# EAGLE board Apo Board 2017 ATmega328_SMD (EAGLE 7.6.0)
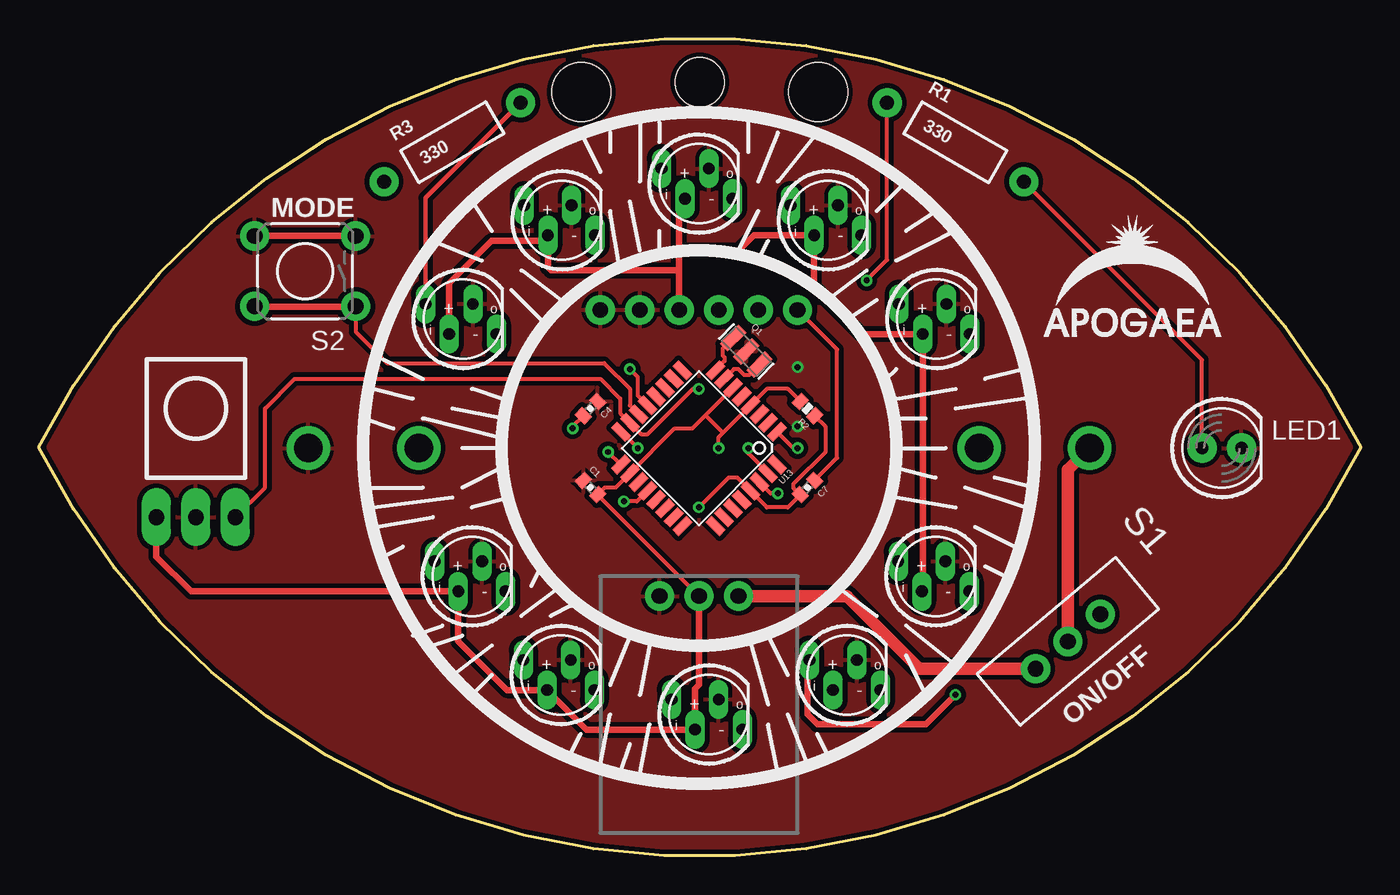
[diagram p0: board, top side]
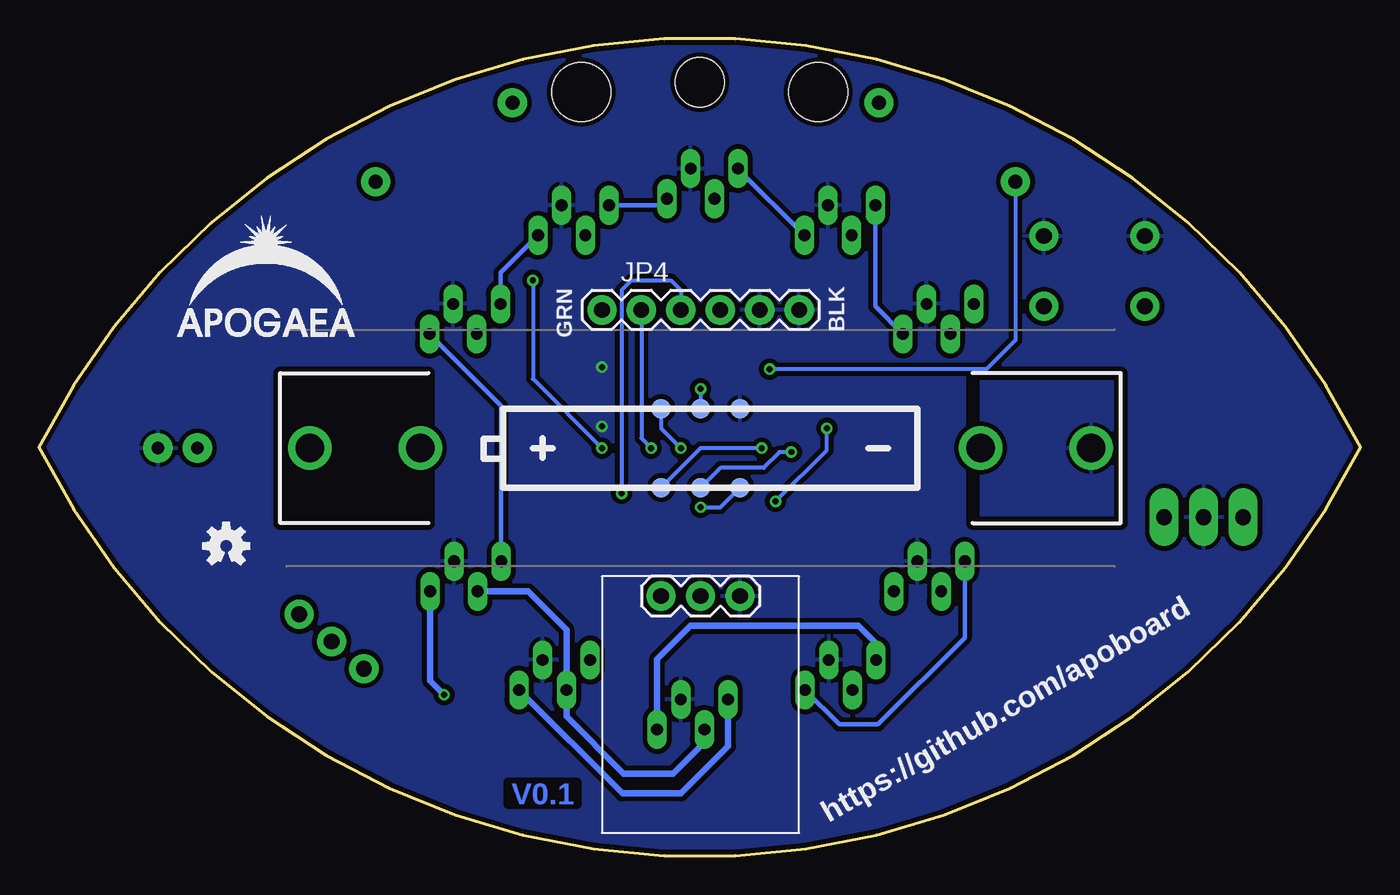
[diagram p1: board, bottom side, seen from below]

Size 85.09 x 52.56 mm. Coordinates in mm from the lower left corner, seen from the top.
Outline: 0,26.28 arc-127 85.09,26.28 arc-127 0,26.28
Copper layers (1*16): Top 0.035mm / dielectric 1.5mm / Bottom 0.035mm
Design rules "SparkFun-2-layer-TIGHT": minimum track width 7mil, minimum drill 15mil, track to track 7mil, track to pad 7mil, pad to pad 7mil, via to via 7mil, smd to smd 7mil, copper to edge 7mil, drill to drill 7mil, minimum pad ring 7mil, minimum via ring 7mil, stop-mask expansion 4mil, vias tented up to drill 25mil, thermal gap 10mil
Net classes: 0 default: width 0.152 mm, drill 0.305 mm, clearance 0.152 mm; 1 vcc: width 0.254 mm; 3 ButtonSignal: width 0.254 mm
Holes 3.17 mm at 42.55,49.78
Holes 3.81 mm at 50.16,49.14 34.92,49.14

## Footprints (pad centres in the part's own frame; a part is rotated, then mirrored left to right if it is on the bottom)
BATTERY-AA-KIT = drill 1.854: GND@1 25.146,0; GND@2 18.034,0; PWR@1 -25.146,0; PWR@2 -18.034,0
0402-CAP = smd 0.7 x 0.9: 1 -0.65,0; 2 0.65,0
1X03_IR_RECEIVER = drill 1.016 pad 1.88 long: 1 -2.54,0; 2 0,0; 3 2.54,0
1X03_BOOST = drill 1.016 pad 1.88: 1 -2.54,0; 2 0,0; 3 2.54,0
FTDI_BASIC = drill 1.016 pad 1.88: CTS 10.16,0; DTR 0,0; GND 12.7,0; RXI 2.54,0; TXO 5.08,0; VCC 7.62,0
LED5MM = drill 0.813 pad 1.88: A -1.27,0; K 1.27,0
RESONATOR-SMD = smd 0.7 x 1.7: 1 -1.2,0; 2 0,0; 3 1.2,0
AXIAL-0.4 = drill 0.9 pad 1.88: P$1 -5.08,0; P$2 5.08,0
0402-RES = smd 0.7 x 0.9: 1 -0.65,0; 2 0.65,0
SWITCH-SPDT_KIT = drill 1.016 pad 1.88: 1 0,2.718; 2 0,0; 3 0,-2.718
TACTILE-PTH = drill 1.016 pad 1.88: 1 -3.251,2.261; 2 3.251,2.261; 3 -3.251,-2.261; 4 3.251,-2.261
PAD.03X.05 = smd 1.27 x 1.27: P$1 0,0
LED-RGB-THRU = drill 0.762 pad 1.27 long: 1 2.413,-0.968; 2 0.889,0.968; 3 -0.635,-0.968; 4 -2.159,0.968
TQFP32-08 = smd 1.27 x 0.559: 1 -4.293,2.8; 2 -4.293,2; 3 -4.293,1.2; 4 -4.293,0.4; 5 -4.293,-0.4; 6 -4.293,-1.2; 7 -4.293,-2; 8 -4.293,-2.8; 17 4.293,-2.8; 18 4.293,-2; 19 4.293,-1.2; 20 4.293,-0.4; 21 4.293,0.4; 22 4.293,1.2; 23 4.293,2; 24 4.293,2.8 | smd 0.559 x 1.27: 9 -2.8,-4.293; 10 -2,-4.293; 11 -1.2,-4.293; 12 -0.4,-4.293; 13 0.4,-4.293; 14 1.2,-4.293; 15 2,-4.293; 16 2.8,-4.293; 25 2.8,4.293; 26 2,4.293; 27 1.2,4.293; 28 0.4,4.293; 29 -0.4,4.293; 30 -1.2,4.293; 31 -2,4.293; 32 -2.8,4.293

## Placement (x,y rotation side)
BAT1  AA  [BATTERY-AA-KIT]  42.49,26.23 0 bottom
C1  0.1uF  [0402-CAP]  35.51,23.69 315 top
C4  0.1uF  [0402-CAP]  35.51,28.77 225 top
C7  0.1uF  [0402-CAP]  49.48,23.69 225 top
FRAME1  FRAME-LETTER  [CREATIVE_COMMONS]  20.68,-13.47 0 top  (outside the outline)
JP1  [1X03_IR_RECEIVER]  10.11,21.79 0 top
JP3  NCP1402  [1X03_BOOST]  42.49,16.71 0 top
JP4  FTDI_BASICPTH  [FTDI_BASIC]  48.84,35.12 0 bottom
LED1  [LED5MM]  76.15,26.23 0 top
LOGO1  OSHW-LOGOS  [OSHW-LOGO-S]  73.03,19.93 0 bottom
Q1  RESONATORSMD  [RESONATOR-SMD]  45.54,32.45 315 top
R1  330  [AXIAL-0.4]  59,45.92 330 top
R2  10K  [0402-RES]  49.48,28.77 135 top
R3  330  [AXIAL-0.4]  26.62,45.92 30 top
S1  [SWITCH-SPDT_KIT]  66.24,13.79 310 top
S2  [TACTILE-PTH]  17.14,37.61 180 top
TP1  TP-3x5  [PAD.03X.05]  45.03,28.77 90 bottom
TP2  TP-3x5  [PAD.03X.05]  42.49,28.77 90 bottom
TP3  TP-3x5  [PAD.03X.05]  39.95,28.77 90 bottom
TP4  TP-3x5  [PAD.03X.05]  45.03,23.69 90 bottom
TP5  TP-3x5  [PAD.03X.05]  42.49,23.69 90 bottom
TP6  TP-3x5  [PAD.03X.05]  39.95,23.69 90 bottom
U1  LED-TRICOLOR-5050-IC  [LED-RGB-THRU]  33.6,11.63 180 top
U3  LED-TRICOLOR-5050-IC  [LED-RGB-THRU]  50.8,40.89 180 top
U4  LED-TRICOLOR-5050-IC  [LED-RGB-THRU]  57.78,34.54 180 top
U5  LED-TRICOLOR-5050-IC  [LED-RGB-THRU]  42.49,43.25 180 top
U6  LED-TRICOLOR-5050-IC  [LED-RGB-THRU]  33.66,40.89 180 top
U7  LED-TRICOLOR-5050-IC  [LED-RGB-THRU]  27.3,34.54 180 top
U8  LED-TRICOLOR-5050-IC  [LED-RGB-THRU]  27.89,17.98 180 top
U9  LED-TRICOLOR-5050-IC  [LED-RGB-THRU]  43.13,9.09 180 top
U10  LED-TRICOLOR-5050-IC  [LED-RGB-THRU]  52.02,11.63 180 top
U11  LED-TRICOLOR-5050-IC  [LED-RGB-THRU]  57.73,17.98 180 top
U13  ATMEGA328  [TQFP32-08]  42.49,26.23 225 top

## Library data of the parts
BAT1 C1 C4 C7 Q1 R2 S1 U13 = SparkFun
FRAME1 LOGO1 = SparkFun-Aesthetics
JP1 JP3 JP4 = SparkFun-Connectors
LED1 U1 U3-U11 = SparkFun-LED
R1 R3 = SparkFun-Resistors
S2 = SparkFun-Electromechanical
TP1-TP6 = SparkFun-Passives

## Nets
+5V: C1.2 JP1.1 JP3.2 JP4.VCC R2.2 TP1.P$1 U1.2 U3.2 U4.2 U5.2 U6.2 U7.2 U8.2 U9.2 U10.2 U11.2 U13.4 U13.6 U13.18
AREF: C4.2 U13.20
BUTTON: S2.1 S2.2 U13.14
DOUT_DIN: U4.4 U11.1
DTR: C7.1 JP4.DTR
GND: BAT1.GND@1 C1.1 C4.1 JP1.2 JP3.1 JP4.CTS JP4.GND LED1.K Q1.2 S2.3 S2.4 TP3.P$1 U1.3 U3.3 U4.3 U5.3 U6.3 U7.3 U8.3 U9.3 U10.3 U11.3 U13.3 U13.5 U13.21
IR_SEND: R1.P$1 U13.1
LED_PIN: R3.P$2 U7.1
MISO: TP4.P$1 U13.16
MOSI: JP1.3 TP2.P$1 U13.15
N$1: U6.1 U7.4
N$2: U5.1 U6.4
N$3: LED1.A R1.P$2
N$4: U13.32
N$5: U3.1 U5.4
N$6: U3.4 U4.1
N$7: BAT1.PWR@1 S1.2
N$8: JP3.3 S1.3
N$9: U10.1 U11.4
N$11: U9.1 U10.4
N$13: U1.1 U9.4
N$14: U1.4 U8.1
N$15: U13.2
N$16: U13.9
N$17: U13.10
N$18: U13.11
N$19: U13.12
N$20: R3.P$1 U13.13
N$22: U13.28
N$23: U13.27
N$24: U13.26
N$25: U13.25
N$26: U13.24
N$27: U13.23
N$29: Q1.1 U13.8
N$30: Q1.3 U13.7
RESET: C7.2 R2.1 TP6.P$1 U13.29
RX: JP4.TXO U13.30
SCK: TP5.P$1 U13.17
TX: JP4.RXI U13.31

## Tracks (layer width: path | path; a pad name or v marks a point on that pad's centre or on a via)
+5V  (via drill 0.38)
  Top 0.254: JP3.2 | JP3.2 C1.2 36.43,23.69 37.13,23.69 U13.18 40.94,27.5 42.07,27.5 42.92,28.35 | 42.92,28.35 U13.6 | 44.05,27.22 U13.4 46.87,30.04 48.21,30.04 R2.2 | 44.05,27.22 43.76,26.94 v43.76,26.23 | 44.05,27.22 42.92,28.35
  Top 0.406: U7.2 26.42,36.82 29.16,39.57 32.41,39.57 U6.2 32.77,37.86 32.97,37.66 41.22,37.66 | JP4.VCC 41.22,37.66 | 41.22,37.66 41.22,38.93 | 41.22,38.93 41.22,41.9 U5.2 | 41.22,38.93 45.03,38.93 46.02,39.92 U3.2 49.91,36.59 52.94,33.57 U4.2 56.9,17.06 U11.2 | JP1.1 7.57,19.25 9.81,17.01 U8.2 27,13.79 30.13,10.66 U1.2 35.26,8.12 U9.2 42.24,10.74 42.49,10.99 JP3.2
  Bottom 0.254: TP1.P$1 45.03,27.5 v43.76,26.23
  Bottom 0.406: U11.2 53.59,17.01 51.13,14.55 U10.2 51.13,8.96 47.45,5.28 44.27,5.28 42.24,7.31 U9.2
AREF  (via drill 0.38)
  Top 0.254: U13.20 38.5,22.8 v37.67,22.8 | v34.37,27.5 34.37,27.63 C4.2
  Bottom 0.254: v37.67,22.8 34.37,26.1 v34.37,27.5
BUTTON
  Top 0.254: S2.2 S2.1 20.4,33.72 22.43,31.69 36.4,31.69 38.05,30.04 38.05,28.98 U13.14
DOUT_DIN
  Bottom 0.305: U4.4 55.32,28.95 U11.1
DTR
  Top 0.254: C7.1 | C7.1 51.38,25.6 51.38,32.58 JP4.DTR
GND  (via drill 0.38)
  other vias: 48.84,27.63 48.84,31.44
  pour Top (isolate 0.305): -13.34,57.4 97.79,57.4 97.79,-4.2 -13.34,-4.2
  pour Bottom (isolate 0.305): 97.1,56.71 -13.34,56.76 -13.39,-2.98 97.1,-2.98
IR_SEND  (via drill 0.38)
  Top 0.254: v48.84,26.23 48.57,26.23 U13.1 | v53.29,37.03 54.61,38.34 R1.P$1
  Bottom 0.254: v53.29,37.03 53.29,30.68 v48.84,26.23
LED_PIN
  Top 0.305: R3.P$2 24.89,42.33 U7.1
MISO  (via drill 0.38)
  Top 0.254: U13.16 37.5,27.29 v38.56,26.23
  Bottom 0.254: v38.56,26.23 42.49,26.23 TP4.P$1
MOSI  (via drill 0.38)
  Top 0.254: JP1.3 14.55,23.69 14.55,28.77 16.46,30.68 36.14,30.68 37.41,29.41 37.41,28.48 U13.15 38.78,27.12 39.19,27.12 42.11,30.04 v42.49,30.04
  Bottom 0.254: v42.49,30.04 TP2.P$1
N$1
  Bottom 0.305: U7.4 31.24,35.35 U6.1
N$2
  Bottom 0.305: U6.4 40.08,44.19 U5.1
N$3
  Top 0.254: LED1.A 74.88,31.9 R1.P$2
N$5
  Bottom 0.305: U5.4 45.08,41.86 U3.1
N$6
  Bottom 0.305: U3.4 55.37,37.51 U4.1
N$7
  Top 0.813: BAT1.PWR@1 66.24,24.83 S1.2
N$8
  Top 0.813: S1.3 56.69,12.04 52.02,16.71 JP3.3
N$9  (via drill 0.38)
  Top 0.406: U10.1 49.48,12.47 49.48,9.09 50.11,8.45 57.1,8.45 v59,10.36
  Bottom 0.406: v59,10.36 59.89,11.25 U11.4
N$11
  Bottom 0.406: U10.4 47.53,4.01 43.76,4.01 40.72,7.05 U9.1
N$13
  Bottom 0.406: U9.4 45.29,12.64 43.13,14.8 32.33,14.8 31.19,13.66 U1.1
N$14
  Bottom 0.305: U1.4 33.56,8.45 31.06,8.45 25.48,14.04 U8.1
N$20  (via drill 0.38)
  Top 0.254: U13.13 38.56,29.6 38.56,30.8 v38.05,31.31
  Bottom 0.254: R3.P$1 22.22,33.17 24.08,31.31 v38.05,31.31
N$29
  Top 0.254: Q1.1 44.02,32.63 44.02,32.2 44.15,32.07 44.15,31.84 U13.8
N$30
  Top 0.254: Q1.3 45.72,30.93 45.42,30.93 45.03,31.31 44.75,31.31 U13.7
RESET  (via drill 0.38)
  Top 0.254: v42.49,22.42 44.4,24.33 44.97,24.33 U13.29 46.87,22.42 48.21,22.42 C7.2 48.59,23.66 48.59,23.95 50.62,25.98 50.62,27.63 R2.1
  Bottom 0.254: v42.49,22.42 41.22,22.42 TP6.P$1
RX  (via drill 0.38)
  Top 0.254: v47.57,23.31 47.11,23.31 U13.30
  Bottom 0.254: v47.57,23.31 47.57,36.39 46.94,37.03 44.4,37.03 43.76,36.39 JP4.TXO
SCK  (via drill 0.38)
  Top 0.254: U13.17 37.45,25.18 v36.65,25.98
  Bottom 0.254: v36.65,25.98 37.41,25.98 38.43,24.96 41.22,24.96 TP5.P$1
TX  (via drill 0.38)
  Top 0.254: v45.67,26.23 45.67,25.88 U13.31
  Bottom 0.254: JP4.RXI 46.3,26.87 v45.67,26.23

## Text on the board
Bottom: V0.1
tPlace: MODE | ON/OFF
bPlace: BLK | GRN | https://github.com/apoboard
tValues: Joel Bartlett